# EAGLE board AniBike_v3.0_MainBoard (EAGLE 5.08)

Size 233.68 x 41.15 mm. Coordinates in mm from the lower left corner, seen from the top.
Outline: 0,0 233.68,0 233.68,41.15 151.38,41.15 116.08,21.34 0,21.34 0,0
Copper layers (1*16): Top 0.035mm / dielectric 1.5mm / Bottom 0.035mm
Design rules "default": minimum track width 10mil, minimum drill 24mil, track to track 8mil, track to pad 8mil, pad to pad 8mil, via to via 8mil, smd to smd 8mil, copper to edge 40mil, drill to drill 8mil, minimum pad ring 10mil, minimum via ring 8mil, stop-mask expansion 4mil, vias tented up to drill 0mil, thermal gap 10mil

## Footprints (pad centres in the part's own frame; a part is rotated, then mirrored left to right if it is on the bottom)
BATTERY_AAA = drill 1.778 pad 3.048 round: MINUS1 21.336,0; MINUS2 13.716,0; PLUS1 -21.336,0; PLUS2 -13.716,0
C0805 = smd 1.2 x 1.3: 1 -1.016,0; 2 1.016,0
C3528-21/T = smd 1.778 x 2.286: + 1.524,0; - -1.524,0
C3216/T = smd 1.5 x 1.27: + 1.397,0; - -1.397,0
L1812 = smd 1.9 x 3.4: 1 -1.95,0; 2 1.95,0
SOT23-5 = smd 0.55 x 1.2: 1 -0.95,-1.3; 2 0,-1.3; 3 0.95,-1.3; 4 0.95,1.3; 5 -0.95,1.3
HC49UP = smd 5.334 x 1.93: 1 -4.826,0; 2 4.826,0
SOT23-BEC = smd 1 x 1.4: B -0.95,-1.1; C 0,1.1; E 0.95,-1.1
CRYSTAL-SMD-5X3 = smd 1.9 x 1.1: 1 -1.85,-1.15; 2 1.85,-1.15; 3 1.85,1.15; 4 -1.85,1.15
R0805 = smd 1.2 x 1.3: 1 -1.016,0; 2 1.016,0
CTS742C083 = smd 0.5 x 0.9: 1 -1.2,-0.8; 2 -0.4,-0.8; 3 0.4,-0.8; 4 1.2,-0.8; 5 1.2,0.8; 6 0.4,0.8; 7 -0.4,0.8; 8 -1.2,0.8
B3F-10XX = drill 1.016 long: 1 -3.251,2.261; 2 3.251,2.261; 3 -3.251,-2.261; 4 3.251,-2.261
S06P = drill 1.016 long: 1 6.25,0; 2 3.75,0; 3 1.25,0; 4 -1.25,0; 5 -3.75,0; 6 -6.25,0
TQFP64 = smd 1.194 x 0.559: 1 -7.76,5.905; 2 -7.76,5.118; 3 -7.76,4.331; 4 -7.76,3.543; 5 -7.76,2.756; 6 -7.76,1.968; 7 -7.76,1.181; 8 -7.76,0.394; 9 -7.76,-0.394; 10 -7.76,-1.181; 11 -7.76,-1.968; 12 -7.76,-2.756; 13 -7.76,-3.543; 14 -7.76,-4.331; 15 -7.76,-5.118; 16 -7.76,-5.905; 33 7.76,-5.905; 34 7.76,-5.118; 35 7.76,-4.331; 36 7.76,-3.543; 37 7.76,-2.756; 38 7.76,-1.968; 39 7.76,-1.181; 40 7.76,-0.394; 41 7.76,0.394; 42 7.76,1.181; 43 7.76,1.968; 44 7.76,2.756; 45 7.76,3.543; 46 7.76,4.331; 47 7.76,5.118; 48 7.76,5.905 | smd 0.559 x 1.194: 17 -5.905,-7.76; 18 -5.118,-7.76; 19 -4.331,-7.76; 20 -3.543,-7.76; 21 -2.756,-7.76; 22 -1.968,-7.76; 23 -1.181,-7.76; 24 -0.394,-7.76; 25 0.394,-7.76; 26 1.181,-7.76; 27 1.968,-7.76; 28 2.756,-7.76; 29 3.543,-7.76; 30 4.331,-7.76; 31 5.118,-7.76; 32 5.905,-7.76; 49 5.905,7.76; 50 5.118,7.76; 51 4.331,7.76; 52 3.543,7.76; 53 2.756,7.76; 54 1.968,7.76; 55 1.181,7.76; 56 0.394,7.76; 57 -0.394,7.76; 58 -1.181,7.76; 59 -1.968,7.76; 60 -2.756,7.76; 61 -3.543,7.76; 62 -4.331,7.76; 63 -5.118,7.76; 64 -5.905,7.76
SOIC8 = smd 0.5 x 2.2: 1 -1.905,-3.154; 2 -0.645,-3.154; 3 0.625,-3.154; 4 1.895,-3.154; 5 1.905,3.154; 6 0.635,3.154; 7 -0.635,3.154; 8 -1.905,3.154
QFN20 = smd 1 x 1: 0 0,0 | smd 0.65 x 0.3: 1 -1.9,1; 2 -1.9,0.5; 3 -1.9,0; 4 -1.9,-0.5; 5 -1.9,-1; 11 1.9,-1; 12 1.9,-0.5; 13 1.9,0; 14 1.9,0.5; 15 1.9,1 | smd 0.3 x 0.65: 6 -1,-1.9; 7 -0.5,-1.9; 8 0,-1.9; 9 0.5,-1.9; 10 1,-1.9; 16 1,1.9; 17 0.5,1.9; 18 0,1.9; 19 -0.5,1.9; 20 -1,1.9
ANTENNA-CHIP5 = smd 1.016 x 2.54: FEED -3.302,0; NC 3.302,0
32005-201 = smd 3.1 x 0.5: 1 3,1.6; 2 3,0.8; 3 3,0; 4 3,-0.8; 5 3,-1.6 | smd 2.5 x 2: M1 -3,-4.45; M2 -3,4.45 | smd 3.3 x 2: M3 2.9,4.45; M4 2.9,-4.45 | hole 0.9: 0,2.2; 0,-2.2

## Placement (x,y rotation side)
BAT1  BATTERY_AAA  [BATTERY_AAA]  149.86,16.76 0 top
BAT2  BATTERY_AAA  [BATTERY_AAA]  199.9,16.76 0 top
BAT3  BATTERY_AAA  [BATTERY_AAA]  199.9,32.77 0 bottom
C1  22pF  [C0805]  213.87,26.42 270 top
C2  22pF  [C0805]  213.87,22.35 90 top
C3  100nF  [C0805]  192.28,38.61 180 top
C4  10uF  [C3528-21/T]  192.28,35.81 0 top
C5  100nF  [C0805]  315.21,93.22 0 top  (outside the outline)
C6  100nF  [C0805]  310.13,93.22 0 top  (outside the outline)
C7  100nF  [C0805]  305.05,93.22 0 top  (outside the outline)
C8  100nF  [C0805]  299.97,93.22 0 top  (outside the outline)
C9  100nF  [C0805]  206.25,15.49 90 top
C10  100nF  [C0805]  197.36,35.81 270 top
C11  47uF  [C3528-21/T]  198.12,13.46 0 top
C12  10uF  [C3528-21/T]  161.04,36.32 90 top
C13  10uF  [C3216/T]  180.85,37.59 270 top
C14  470pF  [C0805]  171.2,25.65 180 bottom
C15  1uF  [C0805]  167.13,25.65 0 bottom
C16  33pF  [C0805]  186.94,24.89 90 top
C17  22pF  [C0805]  194.06,13.46 90 top
C18  22pF  [C0805]  178.56,24.89 90 top
C19  2.2nF  [C0805]  307.85,87.88 0 top  (outside the outline)
C20  4.7pF  [C0805]  157.99,35.31 90 top
C21  1.5pF  [C0805]  144.27,33.27 0 top
C22  1pF  [C0805]  171.2,27.94 180 bottom
F1  500 mA  [L1812]  162.31,27.69 270 bottom
IC1  MIC5219BM5  [SOT23-5]  177.04,38.35 180 top
L1  2.7nH  [L1812]  148.84,33.02 270 top
L2  8.2nH  [L1812]  144.78,28.7 270 top
L3  3.9nH  [L1812]  138.94,27.43 180 top
Q1  20MHz  [HC49UP]  209.3,24.89 90 top
Q2  2N39042N3904-SOT23-BEC  [SOT23-BEC]  167.89,45.47 180 top  (outside the outline)
Q3  2N39042N3904-SOT23-BEC  [SOT23-BEC]  170.18,42.67 0 top
Q4  2N39042N3904-SOT23-BEC  [SOT23-BEC]  165.61,42.67 0 top
Q5  2N39042N3904-SOT23-BEC  [SOT23-BEC]  163.07,45.47 180 top  (outside the outline)
Q6  2N39042N3904-SOT23-BEC  [SOT23-BEC]  160.78,42.67 0 top
Q7  2N39042N3904-SOT23-BEC  [SOT23-BEC]  158.5,45.47 180 top  (outside the outline)
Q8  2N39042N3904-SOT23-BEC  [SOT23-BEC]  156.21,42.67 0 top
Q9  2N39042N3904-SOT23-BEC  [SOT23-BEC]  153.92,45.47 180 top  (outside the outline)
Q10  16 MHz  [CRYSTAL-SMD-5X3]  154.94,31.24 0 top
R1  10K  [R0805]  167.13,27.94 0 bottom
R2  10K  [R0805]  162.31,29.21 180 top
R3  100  [R0805]  162.31,26.92 0 top
R4  22K  [R0805]  306.83,98.3 0 top  (outside the outline)
R5  1M  [R0805]  302.51,98.3 0 top  (outside the outline)
RN1  CTS742C083  [CTS742C083]  189.74,7.87 180 top
RN2  CTS742C083  [CTS742C083]  209.3,37.08 0 top
RN3  CTS742C083  [CTS742C083]  205.74,37.08 0 top
RN4  CTS742C083  [CTS742C083]  193.29,7.87 180 top
RN5  CTS742C083  [CTS742C083]  196.85,7.87 180 top
RN6  CTS742C083  [CTS742C083]  200.41,7.87 180 top
S1  Open  [B3F-10XX]  127,40.89 180 top
SV1  [S06P]  124.97,55.37 180 top  (outside the outline)
U1  PIC32MX420F032H  [TQFP64]  197.1,24.64 0 top
U2  AT26DF321  [SOIC8]  182.63,24.89 0 top
U$1  NRF24L01SMD  [QFN20]  154.18,36.07 0 top
U$2  ANTENNA2SMD5  [ANTENNA-CHIP5]  152.91,27.18 0 top
X1  MINI-USB-32005-201  [32005-201]  168.4,36.07 270 bottom

## Library data of the parts
BAT1-BAT3 C1-C22 F1 IC1 Q1-Q9 R1-R5 RN1-RN6 S1 SV1 U1 U2 X1 = AniBike_v3.0_Library
L1-L3 = rcl
Q10 U$1 U$2 = SparkFun

## Nets
+3V3: C5.2 C6.2 C7.2 C8.2 C9.2 C10.2 C11.+ C12.+ C15.2 IC1.5 Q2.C Q3.C Q4.C Q5.C Q6.C Q7.C Q8.C Q9.C R1.2 R2.2 SV1.2 U1.10 U1.19 U1.26 U1.35 U1.38 U1.57 U2.3 U2.8 U$1.7 U$1.15 U$1.18
+5V: C13.+ F1.2 IC1.1 IC1.3
AN0: SV1.4 U1.16
AN1: SV1.5 U1.15
BLUE1_L1: RN3.4 U1.52
BLUE1_L2: RN6.4 U1.29
BLUE2_L1: RN3.3 U1.53
BLUE2_L2: RN6.3 U1.30
BLUE3_L1: RN3.2 U1.54
BLUE3_L2: RN6.2 U1.31
BLUE4_L1: RN3.1 U1.55
BLUE4_L2: RN6.1 U1.32
COMM_CHIP_ENABLE: U$1.1
COMM_CS: U$1.2
COMM_INT_REQ: U$1.6
COMM_MISO: U$1.5
COMM_MOSI: U$1.4
COMM_SCK: U$1.3
CS: U1.8 U2.1
D+: U1.37 X1.3
D-: U1.36 X1.2
GND: BAT3.MINUS1 BAT3.MINUS2 C1.2 C2.2 C3.2 C4.- C5.1 C6.1 C7.1 C8.1 C9.1 C10.1 C11.- C12.- C13.- C14.1 C15.1 C16.2 C17.2 C18.2 C19.2 C20.2 C22.1 IC1.2 R4.1 S1.3 S1.4 SV1.3 U1.9 U1.20 U1.25 U1.41 U2.4 U$1.0 U$1.8 U$1.14 U$1.17 U$1.20 X1.5
GREEN1_L1: RN2.4 U1.46
GREEN1_L2: RN5.4 U1.23
GREEN2_L1: RN2.3 U1.49
GREEN2_L2: RN5.3 U1.24
GREEN3_L1: RN2.2 U1.50
GREEN3_L2: RN5.2 U1.27
GREEN4_L1: RN2.1 U1.51
GREEN4_L2: RN5.1 U1.28
HALL_SENSOR: U1.42
MISO: U1.5 U2.2
MOSI: U1.6 U2.5
N$1: C2.1 Q1.1 U1.39
N$2: C1.1 Q1.2 U1.40
N$3: F1.1 X1.1
N$4: BAT2.MINUS1 BAT2.MINUS2 BAT3.PLUS1 BAT3.PLUS2
N$5: BAT1.MINUS1 BAT1.MINUS2 BAT2.PLUS1 BAT2.PLUS2
N$6: C3.1 C4.+ U1.56
N$7: C14.2 IC1.4
N$8: R2.1 R3.2 S1.1 S1.2 U1.7
N$9: BAT1.PLUS1 BAT1.PLUS2
N$10: RN1.8
N$11: RN1.7
N$12: RN1.6
N$13: RN1.5
N$16: C16.1 U$1.19
N$17: R4.2 U$1.16
N$18: RN2.8
N$19: RN2.7
N$20: RN2.6
N$21: RN2.5
N$22: C17.1 Q10.3 R5.1 U$1.10
N$23: C19.1 C20.1 L1.2 U$1.11
N$24: C21.1 L3.2
N$25: L1.1 L2.1 U$1.12
N$26: RN3.8
N$27: RN3.7
N$28: RN3.6
N$29: RN3.5
N$30: L2.2 L3.1 U$1.13
N$31: C21.2 C22.2 U$2.FEED
N$32: C18.1 Q10.1 R5.2 U$1.9
N$34: RN4.8
N$35: RN4.7
N$36: RN4.6
N$37: RN4.5
N$42: RN5.8
N$43: RN5.7
N$44: RN5.6
N$45: RN5.5
N$50: RN6.8
N$51: RN6.7
N$52: RN6.6
N$53: RN6.5
N$54: R3.1 SV1.1
RED1_L1: RN1.4 U1.14
RED1_L2: RN4.4
RED2_L1: RN1.3 U1.13
RED2_L2: RN4.3 U1.18
RED3_L1: RN1.2 U1.12
RED3_L2: RN4.2 U1.21
RED4_L1: RN1.1 U1.11
RED4_L2: RN4.1 U1.22
ROW1: Q2.B U1.60
ROW1_LED: Q2.E
ROW2: Q3.B U1.61
ROW2_LED: Q3.E
ROW3: Q4.B U1.62
ROW3_LED: Q4.E
ROW4: Q5.B U1.63
ROW4_LED: Q5.E
ROW5: Q6.B U1.64
ROW5_LED: Q6.E
ROW6: Q7.B U1.1
ROW6_LED: Q7.E
ROW7: Q8.B U1.2
ROW7_LED: Q8.E
ROW8: Q9.B U1.3
ROW8_LED: Q9.E
S$2: U1.17
SCK: U1.4 U2.6
USBID: R1.1 U1.33 X1.4
VBUS: U1.34

## Tracks (layer width: path | path; a pad name or v marks a point on that pad's centre or on a via)
+3V3  (31 unrouted)
+5V  (3 unrouted)
AN0  (1 unrouted)
AN1  (1 unrouted)
BLUE1_L1  (1 unrouted)
BLUE1_L2  (1 unrouted)
BLUE2_L1  (1 unrouted)
BLUE2_L2  (1 unrouted)
BLUE3_L1  (1 unrouted)
BLUE3_L2  (1 unrouted)
BLUE4_L1  (1 unrouted)
BLUE4_L2  (1 unrouted)
CS  (1 unrouted)
D+  (1 unrouted)
D-  (1 unrouted)
GND  (38 unrouted)
GREEN1_L1  (1 unrouted)
GREEN1_L2  (1 unrouted)
GREEN2_L1  (1 unrouted)
GREEN2_L2  (1 unrouted)
GREEN3_L1  (1 unrouted)
GREEN3_L2  (1 unrouted)
GREEN4_L1  (1 unrouted)
GREEN4_L2  (1 unrouted)
MISO  (1 unrouted)
MOSI  (1 unrouted)
N$1  (2 unrouted)
N$2  (2 unrouted)
N$3  (1 unrouted)
N$4  (3 unrouted)
N$5  (3 unrouted)
N$6  (2 unrouted)
N$7  (1 unrouted)
N$8  (4 unrouted)
N$9  (1 unrouted)
N$16  (1 unrouted)
N$17  (1 unrouted)
N$22  (3 unrouted)
N$23  (3 unrouted)
N$24  (1 unrouted)
N$25  (2 unrouted)
N$30  (2 unrouted)
N$31  (2 unrouted)
N$32  (3 unrouted)
N$54  (1 unrouted)
RED1_L1  (1 unrouted)
RED2_L1  (1 unrouted)
RED2_L2  (1 unrouted)
RED3_L1  (1 unrouted)
RED3_L2  (1 unrouted)
RED4_L1  (1 unrouted)
RED4_L2  (1 unrouted)
ROW1  (1 unrouted)
ROW2  (1 unrouted)
ROW3  (1 unrouted)
ROW4  (1 unrouted)
ROW5  (1 unrouted)
ROW6  (1 unrouted)
ROW7  (1 unrouted)
ROW8  (1 unrouted)
SCK  (1 unrouted)
USBID  (2 unrouted)